# Altium PCB ebit_ad.PcbDoc (part 6 of 6)
Units mil, origin at the board's own origin, x right, y up, seen from the top; angles counter-clockwise.
Board outline 3958.82 x 3829.88 mil, 4 copper layers (Top Layer, MidLayer1, MidLayer2, Bottom Layer); 565 components, 392 nets, 1912 pads, 1242 vias.
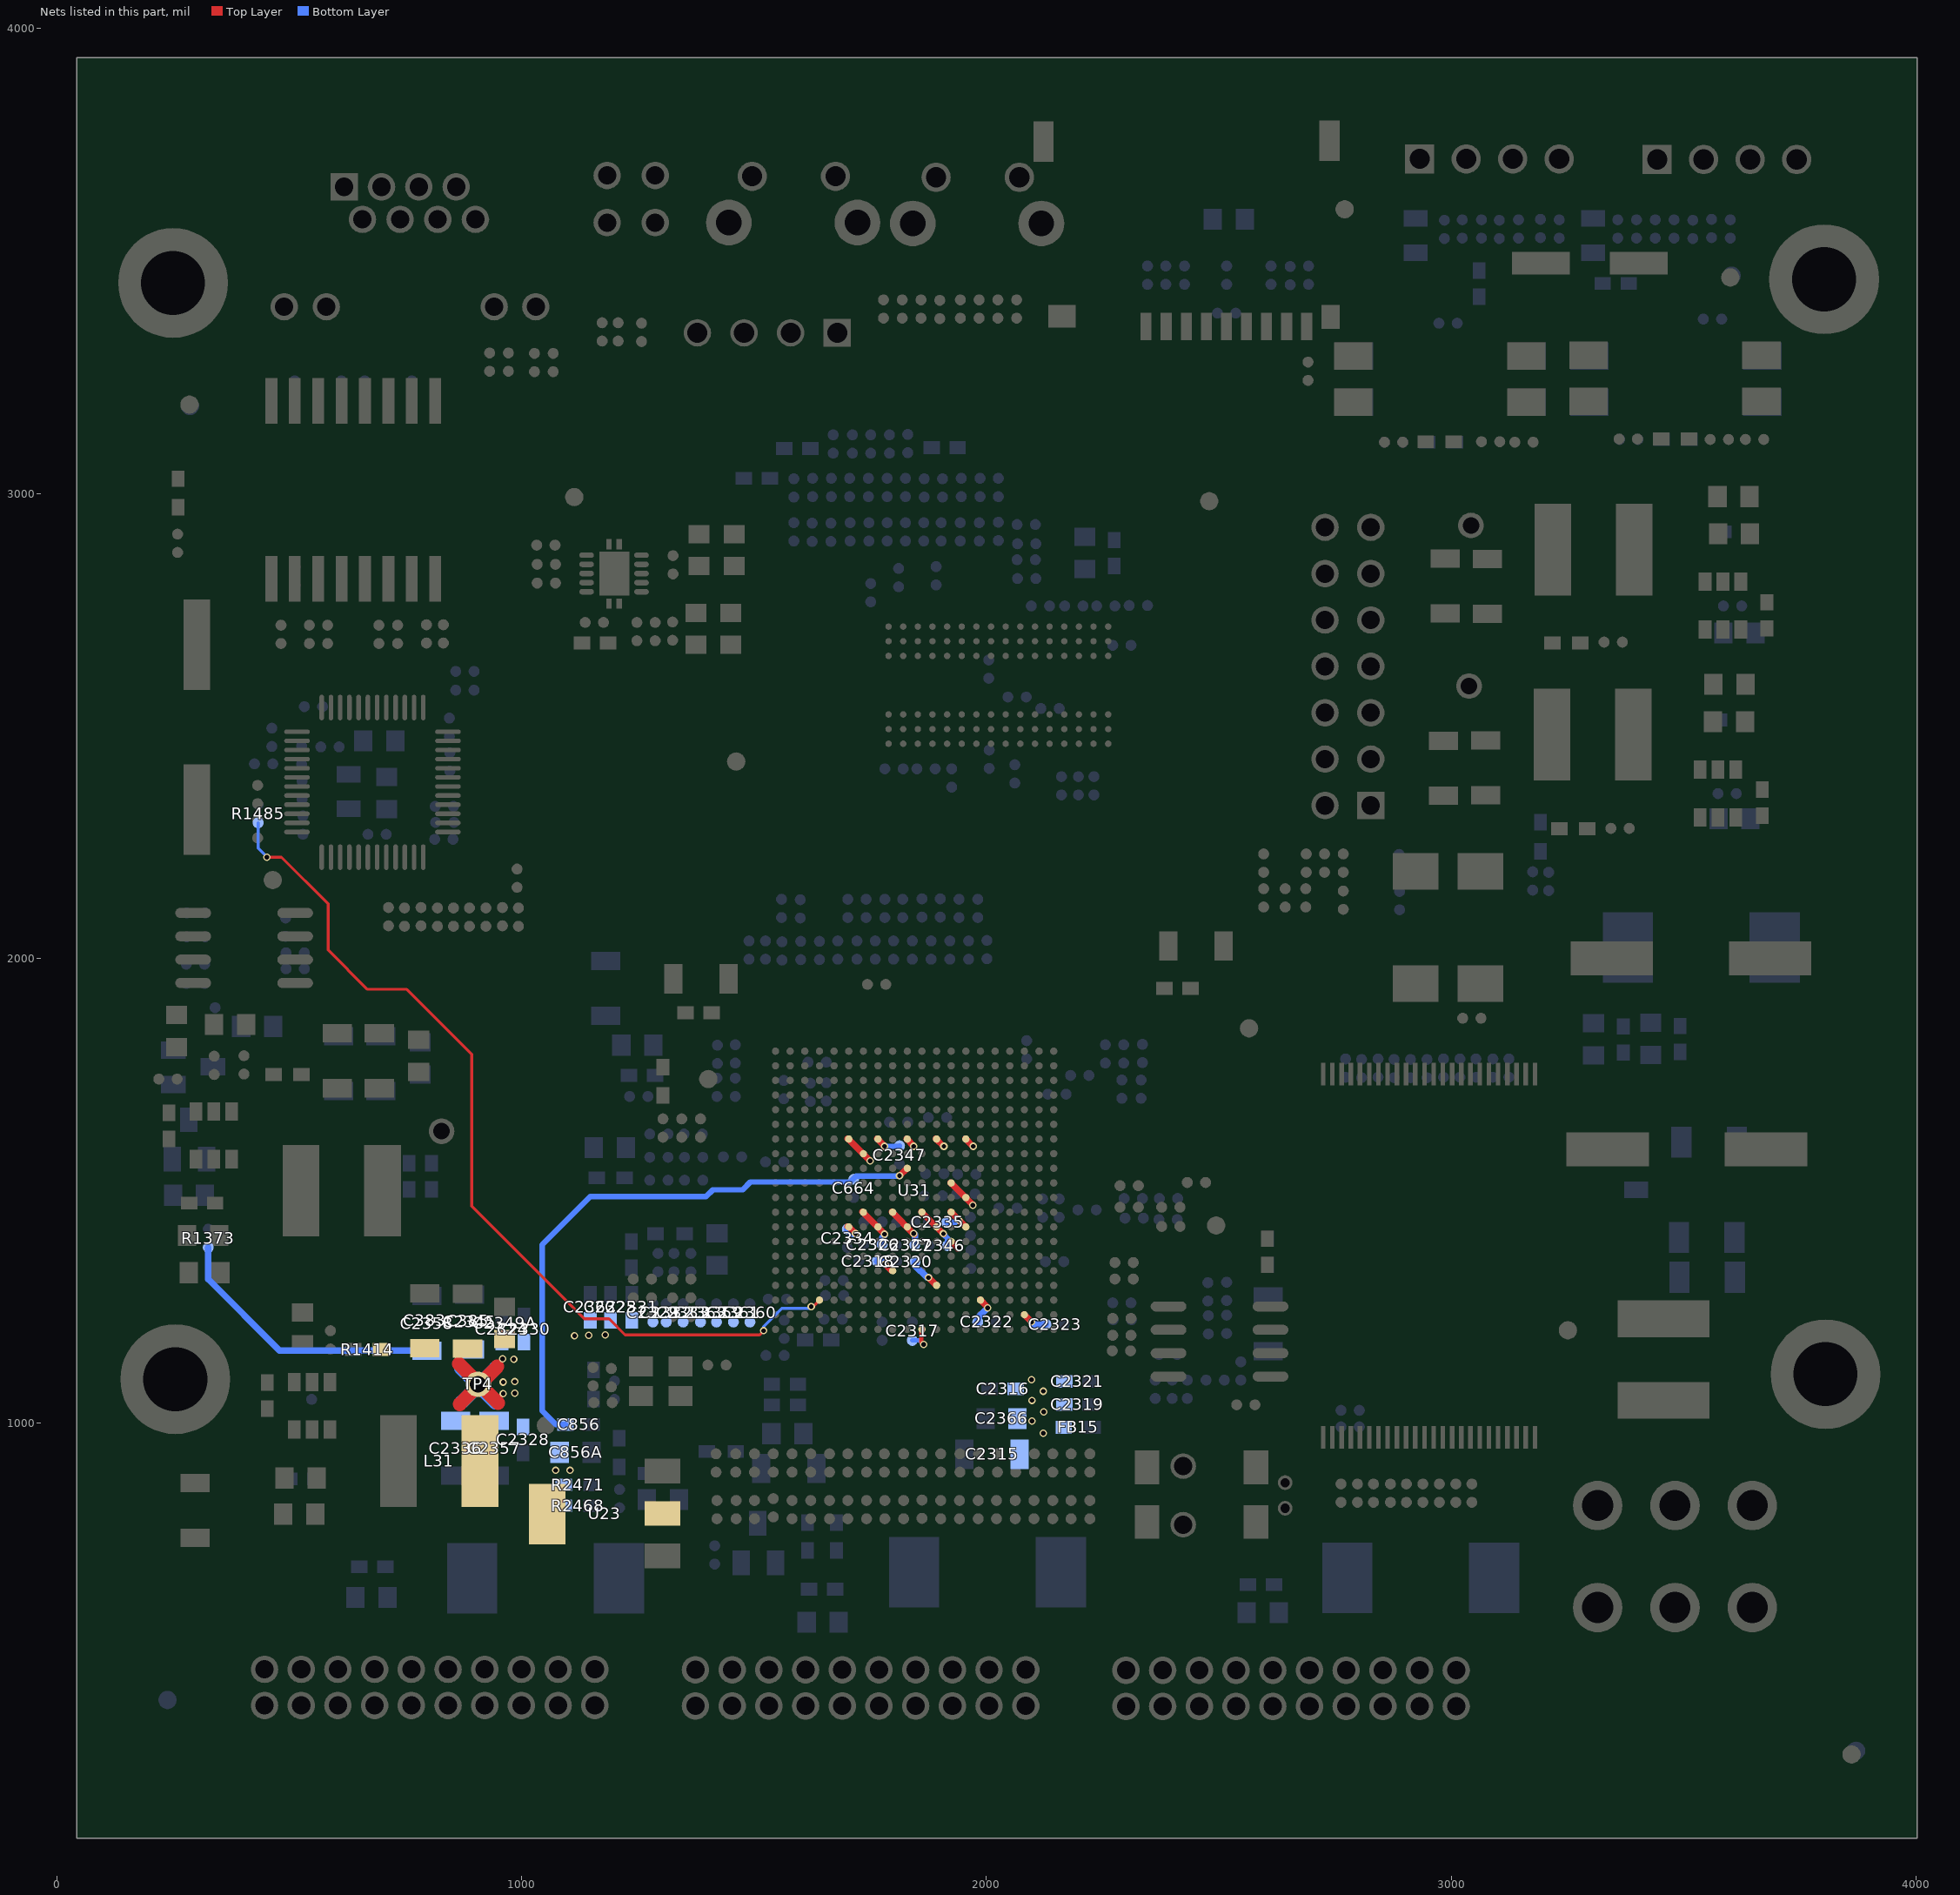
[diagram p8: the nets of this part, all layers, seen from the top]

## Via types
v1: diameter 16, hole 10, Top Layer to Bottom Layer, 1242 vias

## Nets (pads, with @x,y where several pads share a name; then routed paths per layer and width w, separated by ;. In a path a pad name is that pad's centre, name@x,y a point inside that pad or via, vN(x,y) a via of type N, cw(c..) or ccw(c..) an arc to the next point about the centre after c; other vN are vias at no path point) (continued)
VCCO: C2315.1 C2316.1 C2317.2 C2318.1 C2319.2 C2320.1 C2321.2 C2322.2 C2323.2 C2366.1 FB15.2 U31.C19 U31.F18 U31.H14 U31.J17 U31.K20 U31.M16 | length 312.1
  Top Layer w10: U31.K20@1859.82,1202.76 1859.82,1174.63 v1(1865.16,1169.29)
  Top Layer w14: v1(1781.5,1342.52) 1795.48,1328.53 U31.M16@1796.52,1328.53 ; v1@1876.97,1312.01 1876.97,1311.59 U31.J17@1891.47,1297.09 ; U31.H14@1923.13,1391.42 1938.98,1375.57 v1@1938.98,1375 ; U31.F18@1986.43,1265.65 2002.95,1249.12 v1@2002.95,1249.02 ; U31.C19@2081.38,1234.2 2097.44,1218.14 v1(2097.44,1217.52)
  Bottom Layer w10: C2317.2@1840.55,1178.15 1856.3,1178.15 v1(1865.16,1169.29)
  Bottom Layer w14: C2318.1@1764.76,1348.42 1775.59,1348.42 v1(1781.5,1342.52) ; C2320.1@1846.46,1347.44 1846.46,1338.58 1872.05,1312.99 v1@1876.97,1312.99 ; C2322.2@1981.3,1217.52 1981.3,1226.38 v1@2000,1245.08 ; v1@2097.44,1216.54 2101.38,1212.6 C2323.2@2127.95,1212.6
  other v1: 2122.49,978.1 2097.89,1004.66 2123.47,1024.34 2097.89,1048.94 2122.49,1068.62 2096.9,1093.22 2002.25,1247.9 1875,1312.99 1940.94,1375.98
VCCP: C383.1 C385.1 C2324.1 C2325.1 C2326.1 C2327.1 C2328.2 C2329.2 C2330.1 C2331.1 C2332.2 C2333.2 C2334.2 C2335.1 C2336.2 C2345.1 C2346.1 C2347.2 C2349A.1 C2357.2 C2358.1 C2359.2 C2360.2 C2361.2 C2362.1 C2363.2 L31.2 R1373.1 R1414.2 TP4.1 U31.G7 U31.G11 U31.G13 U31.H10 U31.H12 U31.J7 U31.J13 U31.K12 U31.L7 U31.L13 U31.M12 U31.N7 U31.N13 U31.P8 U31.P12 U31.R7 U31.R13 | length 1692.8
  Top Layer w14: U31.R13@1701.57,1422.87 1703.12,1422.87 v1(1718.5,1407.48) ; U31.R7@1701.57,1611.53 1702.44,1611.53 v1(1750,1563.98) ; U31.P12@1733.22,1454.31 1780.51,1407.02 v1(1780.51,1406.5) ; U31.N7@1764.87,1611.53 1780.51,1595.89 v1(1780.51,1595.47) ; U31.M12@1796.52,1454.31 v1@1844.49,1406.34 ; U31.L7@1828.17,1611.53 1843.5,1596.2 v1(1843.5,1595.47) ; U31.K12@1859.82,1454.31 v1@1907.64,1406.5 ; U31.J7@1891.47,1611.53 1907.53,1595.47 v1(1908.46,1595.47) ; U31.H12@1923.13,1454.31 1954.57,1422.87 U31.G13@1954.78,1422.87 ; U31.H10@1923.12,1517.2 1969.85,1470.47 v1@1970.47,1470.47 ; U31.G7@1954.78,1611.53 1970.84,1595.47 v1(1971.46,1595.47)
  Top Layer w30: 864.94,1127.66 949.56,1043.04 ; 866.9,1041.07 947.59,1121.76
  Bottom Layer w12: v1@1782.48,1595.47 1812.01,1595.47 C2347.2@1812.99,1596.46 ; v1@1909.45,1404.53 1916.34,1397.64 C2346.1@1916.34,1381.89 ; C2335.1@1914.37,1432.09 1934.06,1432.09 v1@1938.98,1437.01
  Bottom Layer w14: R1373.1@325.79,1377.95 325.79,1310.04 479.33,1156.5 787.4,1156.5 C2358.1@791.34,1152.56 ; C2334.2@1700.35,1415.98 1709.21,1407.12 v1@1717.08,1407.12 ; C2326.1@1775.59,1383.86 1775.59,1399.61 v1@1780.51,1404.53 ; v1@1842.05,1410.07 1845.98,1406.14 C2327.1@1845.98,1382.52
  Bottom Layer w30: 869.86,1117.82 943.66,1044.02 ; 870.84,1045.01 943.66,1117.82
  other v1: 960.38,1063.7 984.98,1064.69 960.38,1088.3 984.98,1089.29 959.4,1138.49 983.02,1137.5 1113.89,1187.69 1144.39,1188.67 1179.82,1189.66 1907.48,1407.48 1843.25,1407.58 1940.41,1437.02 1970.47,1468.5
VP1_0: C664.2 C856.2 C856A.2 R2468.2 R2471.2 U23.2 U23.4 U31.L9 | length 1272.4
  Top Layer w14: v1(1812.99,1532.48) 1828.17,1547.66 U31.L9@1828.17,1548.64
  Bottom Layer w12: 1044.29,1026.57 1044.29,1383.86 1147.64,1487.2 1396.65,1487.2 1411.42,1501.97 1475.39,1501.97 1492.13,1518.7 1706.69,1518.7 1719.49,1531.5 1812.01,1531.5 v1@1812.99,1530.51 ; 1044.29,1026.57 1073.82,997.05 C856.2@1094.49,997.05
  other v1: 1073.54,898.39 1104.05,898.39
XOUT.0_0: R1485.1 U31.U18 | length 1976.9
  Top Layer w6: v1@452.76,2217.52 483.27,2217.52 583.66,2117.13 583.66,2017.72 668.31,1933.07 752.95,1933.07 892.72,1793.31 892.72,1466.54 1134.84,1224.41 1187.99,1224.41 1222.44,1189.96 1511.81,1189.96 v1(1520.67,1198.82) ; v1@1625,1249.02 1638.26,1262.28 U31.U18@1638.26,1265.65
  Bottom Layer w6: R1485.1@433.07,2291.34 433.07,2237.2 v1@453.74,2216.54 ; v1(1520.67,1198.82) 1520.67,1207.68 1560.04,1247.05 v1@1620.08,1247.05
  other v1: 1623.03,1250.98 451.77,2217.52
pads on no net: DATA1.10 DATA2.10 DATA3.10 J8.12 J8.14 R2434.1 R2435.1 R2441.1 R2442.1 R2443.1 R2444.2 R2445B.2 R2446.2 R2447.2 T6.4 T6.5 T6.12 T6.13 U12.1 U12.2 U12.3 U12.4 U12.5 U12.6 U12.10 U12.11 U12.14 U12.15 U12.20 U12.21 U12.22 U12.23 U12.24 U12.26 U12.27 U12.28 U12.33 U12.35 U12.40 U12.45 U12.46 U12.47 U24.1 U24.27 U24.37 U24.38 U24.39 U31.A7 U31.A10 U31.A11 U31.B9 U31.B17 U31.C8 U31.C10 U31.C11 U31.D10 U31.D11 U31.D15 U31.E14 U31.E17 U31.E18 U31.F14 U31.F16 U31.F17 U31.G14 U31.G15 U31.G17 U31.G18 U31.H15 U31.J14 U31.J15 U31.J16 U31.K14 U31.K16 U31.L15 U31.M14 U31.M15 U31.N15 U31.P1 U31.P3 U31.P14 U31.P15 U31.P16 U31.R1 U31.R2 U31.R3 U31.R14 U31.R16 U31.R17 U31.T1 U31.T2 U31.T4 U31.T5 U31.T9 U31.T10 U31.T11 U31.T12 U31.T14 U31.T15 U31.T16 U31.T17 U31.U2 U31.U3 U31.U4 U31.U5 U31.U7 U31.U8 U31.U9 U31.U10 U31.U17 U31.V1 U31.V2 U31.V3 U31.V5 U31.V6 U31.V7 U31.V8 U31.V10 U31.V11 U31.W1 U31.W3 U31.W4 U31.W5 U31.W6 U31.W8 U31.W9 U31.W10 U31.W11 U31.Y1 U31.Y2 U31.Y3 U31.Y4 U31.Y6 U31.Y7 U31.Y8 U31.Y9 U31.Y11 U31.Y12 U31.Y13 U65.5 U65.6 U65.8 U66.J1 U66.J9 U66.L1 U66.L9 U66.M7 Y2.3 Y2.4

## Polygon pours and split planes (outlines as drawn)
GNDA on Top Layer "Top Layer-GNDA" (solid, remove dead copper, pour order 914): 71.83,848.21 358.18,848.21 405.41,895.44 405.41,1168.99 338.5,1235.9 152.52,1235.9 127.92,1260.5 127.92,3124.2 388.68,3384.96 388.68,3800.21 435.91,3847.44 3733.3,3847.44 3804.14,3776.59 3804.14,3687.05 3656.54,3539.45 3656.54,3391.85 3811.03,3237.36 3811.03,1321.51 3657.53,1168.01 3657.53,1045.99 3755.93,947.59 3949.78,947.59 3973.39,971.21 3973.39,3747.07 ccw(c3817.92,3747.07) 3817.92,3902.54 220.42,3902.54 ccw(c220.42,3751.01) 68.88,3751.01 68.88,850.18
GND on Top Layer "Top Layer-GND 8" (solid, remove dead copper, pour order 913): 1289.04,1743.65 1357.92,1743.65 1357.92,1763.33 1368.74,1774.15 1368.74,1960.13 1458.29,2049.67 1458.29,2373.41 cw(c1458.29,2415.72) 1415.98,2415.72 cw(c1473.05,2415.72) 1473.05,2472.79 1492.73,2472.79 1492.73,2628.26 1700.35,2835.89 1967.02,2835.89 2039.83,2763.07 2301.58,2763.07 2435.4,2629.25 2435.4,1938.48 2237.62,1740.7 2237.62,1727.9 2386.2,1727.9 2400.96,1742.66 2400.96,1783.01 2542.66,1924.7 2542.66,2840.81 2214,3169.46 1247.71,3169.46 1169.98,3091.73 1169.98,2649.91 1111.92,2591.86 1111.92,2566.27 1146.36,2531.83 1146.36,2082.14 1288.06,1940.45 1288.06,1744.63
NetL37_1 on Top Layer "Top Layer-NetL37_1" (solid, remove dead copper, pour order 912): 3245.23,1114.87 3607.34,1114.87 3628.01,1094.21 3628.01,1024.34 3830.71,821.64 3830.71,411.31 3804.14,384.74 3180.29,384.74 3156.67,408.36 3156.67,824.59 3225.55,893.47 3225.55,1096.18 3245.23,1115.86
VCC8 on Top Layer "Top Layer-VCC8" (solid, remove dead copper, pour order 911): 3341.66,1288.06 3341.66,1175.88 3602.42,1175.88 3766.75,1340.21 3766.75,2167.75 3752.98,2181.53 3528.62,2181.53 3528.62,1468.13 3348.55,1288.06
GND3 on Top Layer "Top Layer-GND3" (solid, remove dead copper, pour order 910): 3252.12,2030.98 3437.11,2030.98 3490.25,1977.84 3490.25,1475.02 3310.18,1294.94 3252.12,1294.94
VCC1 on Top Layer "Top Layer-VCC1" (solid, remove dead copper, pour order 909): 1240.82,2823.1 1295.93,2823.1 1304.78,2814.24 1523.23,2814.24 1655.09,2946.1 2038.85,2946.1 2046.72,2953.97 2046.72,3056.3 2023.1,3079.92 1580.3,3079.92 1518.31,3017.93 1518.31,2900.83 1491.74,2874.26 1371.7,2874.26 1338.24,2840.81 1293.96,2840.81 1285.1,2831.95 1242.79,2831.95 1242.79,2823.1
VCCA on Top Layer "Top Layer-VCCA" (solid, remove dead copper, pour order 908): 513.65,1775.14 822.62,1775.14 854.11,1743.65 854.11,1597.03 788.18,1531.1 788.18,1394.33 652.39,1394.33 652.39,1623.6 609.1,1666.9 531.36,1666.9 509.71,1688.54 509.71,1772.18
VCC on Top Layer "Top Layer-VCC" (solid, remove dead copper, pour order 907): 2946.1,2631.22 3259.99,2631.22 3271.8,2619.41 3271.8,2389.15 3262.94,2380.3 3124.2,2380.3 3090.74,2413.75 2946.1,2413.75 2935.27,2424.58 2935.27,2619.41 2946.1,2630.23
VCCP on Top Layer "Top Layer-VCCP" (solid, remove dead copper, pour order 906): 690.77,1196.54 981.05,1196.54 993.84,1183.75 993.84,814.75 986.95,807.86 848.21,807.86 848.21,1045.01 783.26,1109.95 774.41,1118.81 693.72,1118.81 681.91,1130.62 681.91,1185.72 690.77,1194.58
VCC-DDR on Top Layer "Top Layer-VCC-DDR" (solid, remove dead copper, pour order 905): 2900.83,2979.55 3260.98,2979.55 3260.98,2772.91 3142.9,2772.91 3107.47,2808.34 2894.93,2808.34 2894.93,2973.65
GND on Top Layer "Top Layer-GND 4" (solid, remove dead copper, pour order 904): 495.94,1324.46 943.66,1324.46 976.13,1291.99 976.13,1225.08 966.29,1215.24 490.03,1215.24 490.03,1317.58
NetU22_2 on Top Layer "Top Layer-NetU22_2" (solid, remove dead copper, pour order 902): 3349.54,2591.86 3463.68,2591.86 3477.46,2578.08 3477.46,2396.04 3499.1,2374.39 3564.05,2374.39 3564.05,2422.61 3584.71,2422.61 3584.71,2349.79 3571.92,2337 3360.36,2337 3341.66,2355.7 3341.66,2581.03 3349.54,2588.9
NetU26_2 on Top Layer "Top Layer-NetU26_2" (solid, remove dead copper, pour order 901): 538.25,972.19 560.88,972.19 560.88,1018.44 628.78,1018.44 650.42,996.79 650.42,810.82 783.26,810.82 783.26,1031.23 759.65,1054.85 552.02,1054.85 538.25,1041.07
NetU28_2 on Top Layer "Top Layer-NetU28_2" (solid, remove dead copper, pour order 900): 448.7,1391.38 572.69,1391.38 572.69,1619.66 558.91,1633.44 336.53,1633.44 325.7,1622.62 325.7,1551.77 347.35,1551.77 347.35,1600.97 414.26,1600.97 437.88,1577.35 437.88,1402.2
NetU27_2 on Top Layer "Top Layer-NetU27_2" (solid, remove dead copper, pour order 899): 3346.58,2987.42 3471.55,2987.42 3478.44,2980.54 3478.44,2803.42 3501.07,2780.78 3564.05,2780.78 3574.87,2791.61 3574.87,2828.02 3597.5,2828.02 3597.5,2762.09 3578.81,2743.39 3368.23,2743.39 3347.57,2764.06 3347.57,2982.5
VP1_0 on Top Layer "Top Layer-VP1_0" (solid, remove dead copper, pour order 898): 1125.7,916.1 1211.3,830.5 1346.11,830.5 1346.11,777.36 1153.25,777.36 1103.06,727.18 1024.34,727.18 1016.47,735.05 1016.47,867.89 1065.67,917.09 1126.68,917.09
IN on Top Layer "Top Layer-IN 2" (solid, remove dead copper, pour order 897): 324.72,1498.63 324.72,1306.75 340.46,1291.01 404.42,1291.01 419.18,1305.77 419.18,1552.75 388.68,1583.26 365.06,1583.26 365.06,1533.07 329.64,1497.65
VCC8 on Top Layer "Top Layer-VCC8 1" (solid, remove dead copper, pour order 896): 3124.2,3510.91 3124.2,3400.7 3139.94,3384.96 3292.46,3384.96 3307.22,3399.72 3307.22,3512.88 3302.3,3517.8 3127.15,3517.8
GND on Top Layer "Top Layer-GND 5" (solid, remove dead copper, pour order 895): 285.36,1584.24 232.22,1531.1 232.22,1304.78 247.97,1289.04 304.06,1289.04 304.06,1520.28 309.96,1526.18 309.96,1584.24
GND on Top Layer "Top Layer-GND 2" (solid, remove dead copper, pour order 894): 2947.08,2778.82 3101.57,2778.82 3113.38,2767.01 3113.38,2674.51 3105.5,2666.64 2949.05,2666.64 2941.18,2674.51 2941.18,2767.01 2948.06,2773.9
VCC-DDR on Top Layer "Top Layer-VCC-DDR 1" (solid, remove dead copper, pour order 893): 1393.34,1955.21 1428.77,1990.63 1495.68,1990.63 1503.55,1982.76 1503.55,1823.35 1489.78,1809.58 1409.09,1809.58 1394.33,1824.34 1394.33,1955.21
VCC-DDR on Top Layer "Top Layer-VCC-DDR 2" (solid, remove dead copper, pour order 892): 1244.76,2811.29 1287.07,2811.29 1300.85,2797.51 1499.62,2797.51 1499.62,2727.65 1485.84,2713.87 1281.17,2713.87 1281.17,2754.22 1293.96,2767.01 1293.96,2796.53 1287.07,2803.42 1244.76,2803.42
GND on Top Layer "Top Layer-GND" (solid, remove dead copper, pour order 891): 2946.1,2371.44 3103.54,2371.44 3112.39,2362.58 3112.39,2280.91 3101.57,2270.09 2948.06,2270.09 2937.24,2280.91 2937.24,2359.63 2948.06,2370.46
VCC on Top Layer "Top Layer-VCC 2" (solid, remove dead copper, pour order 890): 1025.33,2851.63 1025.33,2680.42 1048.94,2656.8 1141.44,2656.8 1148.33,2663.69 1148.33,2789.64 1046.98,2789.64 1046.98,2853.6 1025.33,2853.6
GND3 on Top Layer "Top Layer-GND3 1" (solid, remove dead copper, pour order 889): 3341.66,3518.78 3466.63,3518.78 3466.63,3387.91 3458.76,3380.04 3365.28,3380.04 3365.28,3433.18 3361.34,3437.11 3342.65,3437.11 3342.65,3517.8
GND on Top Layer "Top Layer-GND 1" (solid, remove dead copper, pour order 888): 3614.23,2614.49 3673.27,2614.49 3684.1,2603.66 3684.1,2439.34 3634.9,2390.14 3603.41,2390.14 3603.41,2451.14 3611.28,2459.02 3611.28,2614.49
GND on Top Layer "Top Layer-GND 3" (solid, remove dead copper, pour order 887): 3624.07,3020.88 3678.19,3020.88 3688.03,3011.04 3688.03,2839.82 3637.85,2789.64 3612.26,2789.64 3612.26,2864.42 3617.18,2869.34 3617.18,3010.06 3626.04,3018.91
GND on Top Layer "Top Layer-GND 6" (solid, remove dead copper, pour order 886): 494.95,1006.63 441.82,953.5 441.82,775.39 509.71,775.39 509.71,934.8 520.54,945.62 520.54,1003.68 494.95,1003.68
IN on Top Layer "Top Layer-IN" (solid, remove dead copper, pour order 885): 3511.9,2616.46 3587.66,2616.46 3587.66,2476.73 3545.35,2434.42 3545.35,2390.14 3518.78,2390.14 3512.88,2396.04 3512.88,2612.52
IN on Top Layer "Top Layer-IN 1" (solid, remove dead copper, pour order 884): 3521.74,3020.88 3596.52,3020.88 3596.52,2881.15 3558.14,2842.78 3558.14,2796.53 3527.64,2796.53 3522.72,2801.45 3522.72,3019.9
IN on Top Layer "Top Layer-IN 3" (solid, remove dead copper, pour order 883): 577.61,999.74 607.13,999.74 607.13,773.42 536.28,773.42 536.28,915.12 576.62,955.46 576.62,1000.73
VCC on Top Layer "Top Layer-VCC 1" (solid, remove dead copper, pour order 882): 1311.67,977.11 1361.86,977.11 1367.76,971.21 1367.76,852.14 1280.18,852.14 1266.41,865.92 1266.41,916.1 1301.83,916.1 1312.66,926.93 1312.66,975.14
GND on Top Layer "Top Layer-GND 7" (solid, remove dead copper, pour order 903): 388.68,1905.02 756.7,1905.02 812.78,1848.94 812.78,1812.53 804.91,1804.66 469.37,1804.66 442.8,1778.09 395.57,1778.09 383.76,1789.9 383.76,1902.07
GND on MidLayer1 "MidLayer1-GND" (solid, remove dead copper, pour order 917): 423.12,3904.51 1361.86,3904.51 2259.26,3810.05 2375.38,3810.05 2563.32,3873.02 2798.5,3896.64 2800.46,3628.99 3238.34,3190.13 3577.82,3188.16 3712.63,3055.32 3715.58,1949.3 3180.29,1423.85 3185.21,132.84 229.27,133.82 122.02,243.05 124.97,789.17 138.74,799.99 394.58,801.96 446.74,856.08 446.74,1230.98 409.34,1268.38 178.1,1268.38 164.33,1286.09 158.42,3052.37 413.28,3306.24 414.26,3889.75 424.1,3904.51
GND3 on MidLayer1 "MidLayer1-GND3" (solid, remove dead copper, pour order 916): 2813.26,3890.74 2813.26,3637.85 3245.23,3205.87 3588.65,3205.87 3729.36,3065.16 3729.36,1927.66 3715.58,1927.66 3199.97,1412.04 3199.97,132.84 3825.79,132.84 ccw(c3825.79,275.52) 3968.47,275.52 3968.47,3788.4 3918.29,3861.22 3869.09,3893.69 3813.98,3907.46
GNDA on MidLayer1 "MidLayer1-GNDA" (solid, remove dead copper, pour order 915): 386.71,3880.9 386.71,3332.81 126.94,3073.03 126.94,1266.41 152.52,1240.82 382.78,1240.82 404.42,1219.18 404.42,864.94 388.68,849.19 68.88,849.19 68.88,3783.48 113.16,3851.38 189.91,3888.77 325.7,3903.53 382.78,3902.54 386.71,3881.88
VCC on MidLayer2 "MidLayer2-VCC" (solid, remove dead copper, pour order 927): 429.02,3887.78 3700.82,3901.56 3835.63,3878.93 3923.21,3828.74 3961.58,3766.75 3961.58,3712.63 3945.84,3656.54 3185.21,3654.58 3098.62,3570.94 3098.62,3265.9 3223.58,3143.88 3222.6,2067.38 3153.72,2004.41 3157.66,1364.81 2548.56,757.68 795.07,754.73 556.94,990.89 556.94,1338.24 339.48,1554.72 340.46,1901.09 320.78,1918.8 158.42,1920.77 160.39,3103.54 420.17,3370.2 420.17,3886.8 430.01,3887.78
VCC-DDR on MidLayer2 "MidLayer2-VCC-DDR" (solid, remove dead copper, pour order 926): 1354.97,3108.46 2831.95,3108.46 2940.19,3000.22 2940.19,2667.62 2522.98,2250.41 2522.98,1955.21 2241.55,1673.78 1349.06,1673.78 1327.42,1695.43 1327.42,3075 1353.98,3108.46
IN on MidLayer2 "MidLayer2-IN" (solid, remove dead copper, pour order 925): 3240.31,3029.74 3693.94,3029.74 3708.7,3014.98 3708.7,1965.05 3587.66,1844.02 3587.66,1259.52 3128.14,799.99 3128.14,597.29 3052.37,521.52 407.38,521.52 407.38,1185.72 327.67,1265.42 203.69,1265.42 161.38,1307.74 161.38,1900.1 320.78,1900.1 320.78,1543.9 541.2,1323.48 541.2,969.24 771.46,738.98 2562.34,738.98 3175.37,1352.02 3175.37,1992.6 3240.31,2057.54
GNDA on MidLayer2 "MidLayer2-GNDA" (solid, remove dead copper, pour order 924): 3743.14,1255.58 3956.66,1255.58 3956.66,268.63 3828.74,140.71 192.86,140.71 118.08,182.04 69.86,263.71 68.88,3643.75 121.03,3808.08 201.72,3874.99 290.28,3894.67 384.74,3893.69 381.79,3370.2 122.02,3114.36 123,1260.5 156.46,1226.06 302.09,1227.05 376.87,1154.23 369.98,314.88 391.63,295.2 3741.17,302.09 3823.82,385.73 3823.82,881.66 3657.53,1049.93 3655.56,1173.91
VCC8 on MidLayer2 "MidLayer2-VCC8" (solid, remove dead copper, pour order 923): 3196.03,3638.83 3957.65,3638.83 3957.65,1611.79 3908.45,1562.59 3623.09,1562.59 3612.26,1573.42 3612.26,1830.24 3735.26,1953.24 3735.26,3030.72 3690,3075.98 3322.97,3075.98 3130.1,3268.85 3130.1,3574.87 3193.08,3637.85
VCCP on MidLayer2 "MidLayer2-VCCP" (solid, remove dead copper, pour order 922): 878.71,1025.33 1399.25,1025.33 1399.25,1130.62 1575.38,1306.75 1754.47,1306.75 1754.47,1363.82 1759.39,1368.74 1891.25,1368.74 1919.78,1397.28 1987.68,1397.28 2076.24,1485.84 2076.24,1555.7 2048.69,1583.26 2048.69,1616.71 1857.79,1616.71 1849.92,1608.84 1469.11,1608.84 1429.75,1569.48 1172.93,1569.48 1172.93,1583.26 931.85,1824.34 748.82,1824.34 684.86,1760.38 684.86,1481.9 864.94,1301.83 864.94,1045.01 879.7,1025.33
NetL37_1 on MidLayer2 "MidLayer2-NetL37_1" (solid, remove dead copper, pour order 921): 3177.34,381.79 3755.93,381.79 3782.5,408.36 3782.5,876.74 3681.14,978.1 3361.34,978.1 3152.74,769.49 3152.74,410.33 3180.29,382.78
VCCA on MidLayer2 "MidLayer2-VCCA" (solid, remove dead copper, pour order 920): 787.2,1738.73 844.27,1738.73 860.02,1722.98 860.02,1690.51 1075.51,1475.02 1470.1,1475.02 1528.15,1533.07 1825.32,1533.07 1857.79,1565.54 1997.52,1565.54 1997.52,1549.8 1910.93,1463.21 1774.15,1463.21 1760.38,1476.98 1571.45,1476.98 1453.37,1358.9 1033.2,1358.9 772.44,1619.66 772.44,1720.03 787.2,1734.79
VCCO on MidLayer2 "MidLayer2-VCCO" (solid, remove dead copper, pour order 919): 1809.58,958.42 2162.83,958.42 2181.53,977.11 2181.53,1162.1 2096.9,1246.73 2029.99,1246.73 1964.06,1312.66 1964.06,1370.71 1957.18,1377.6 1926.67,1377.6 1902.07,1353 1766.28,1353 1766.28,1301.83 1806.62,1261.49 1806.62,959.4
VCCE on MidLayer2 "MidLayer2-VCCE" (solid, remove dead copper, pour order 918): 1437.62,955.46 1789.9,955.46 1789.9,1253.62 1752.5,1291.01 1585.22,1291.01 1418.93,1124.71 1418.93,977.11
GND on Bottom Layer "Bottom Layer-GND" (solid, remove dead copper, pour order 979): 1264.44,1687.56 1364.81,1687.56 1382.52,1705.27 1382.52,1884.36 1450.42,1952.26 1450.42,2606.62 1537.99,2694.19 1537.99,2959.87 1501.58,2996.28 1501.58,3053.35 1514.38,3066.14 1539.96,3066.14 1598.02,3124.2 1912.9,3124.2 1912.9,3080.9 2050.66,3080.9 2092.97,3038.59 2092.97,2883.12 2292.72,2883.12 2326.18,2849.66 2335.03,2840.81 2335.03,2742.41 2444.26,2633.18 2444.26,1939.46 2368.49,1863.7 2368.49,1755.46 2358.65,1745.62 2358.65,1724.95 2372.42,1724.95 2372.42,1733.81 2443.27,1804.66 2443.27,1866.65 2520.02,1943.4 2520.02,2848.68 2173.66,3195.05 1292.98,3195.05 1111.92,3013.99 1111.92,1946.35 1139.47,1918.8 1220.16,1918.8 1262.47,1876.49 1262.47,1688.54
GNDA on Bottom Layer "Bottom Layer-GNDA" (solid, remove dead copper, pour order 978): 3639.82,946.61 3961.58,946.61 3974.38,959.4 3974.38,3571.92 3922.22,3624.07 3722.47,3624.07 3657.53,3559.13 3657.53,3390.86 3814.97,3233.42 3814.97,1665.91 3787.42,1638.36 3579.79,1638.36 3564.05,1622.62 3564.05,1017.46 3634.9,946.61
VCC8 on Bottom Layer "Bottom Layer-VCC8 1" (solid, remove dead copper, pour order 977): 3567,2172.67 3776.59,2172.67 3776.59,1671.82 3562.08,1671.82 3562.08,2171.69
GND on Bottom Layer "Bottom Layer-GND 3" (solid, remove dead copper, pour order 976): 3217.68,1804.66 3522.72,1804.66 3522.72,1545.86 3137.98,1545.86 3123.22,1560.62 3123.22,1713.14 3213.74,1803.67
IN on Bottom Layer "Bottom Layer-IN 2" (solid, remove dead copper, pour order 975): 3278.69,1832.21 3532.56,1832.21 3532.56,2186.45 3521.74,2197.27 3337.73,2197.27 3270.82,2130.36 3270.82,1842.05 3279.67,1833.19
GND3 on Bottom Layer "Bottom Layer-GND3" (solid, remove dead copper, pour order 974): 3249.17,1518.31 3520.75,1518.31 3520.75,1215.24 3257.04,1215.24 3243.26,1229.02 3243.26,1514.38
VCC-DATA1 on Bottom Layer "Bottom Layer-VCC-DATA1" (solid, remove dead copper, pour order 973): 2895.91,745.87 3130.1,745.87 3138.96,737.02 3138.96,345.38 2975.62,345.38 2975.62,510.7 2891.98,594.34 2891.98,742.92
VCC-DATA2 on Bottom Layer "Bottom Layer-VCC-DATA2" (solid, remove dead copper, pour order 972): 2066.4,774.41 2208.1,774.41 2227.78,754.73 2227.78,348.34 2219.9,340.46 2055.58,340.46 2044.75,351.29 2044.75,751.78 2066.4,773.42
VCC-DATA3 on Bottom Layer "Bottom Layer-VCC-DATA3" (solid, remove dead copper, pour order 971): 1144.39,737.02 1274.28,737.02 1302.82,708.48 1302.82,349.32 1295.93,342.43 1124.71,342.43 1124.71,726.19 1145.38,726.19
VCCA on Bottom Layer "Bottom Layer-VCCA" (solid, remove dead copper, pour order 970): 596.3,1775.14 861,1775.14 877.73,1758.41 877.73,1599 820.66,1541.93 610.08,1541.93 572.69,1579.32 572.69,1754.47 592.37,1774.15
NetJ3_2 on Bottom Layer "Bottom Layer-NetJ3_2" (solid, remove dead copper, pour order 969): 3281.64,3574.87 3366.26,3574.87 3366.26,3766.75 3377.09,3777.58 3478.44,3777.58 3490.25,3765.77 3490.25,3663.43 3575.86,3663.43 3589.63,3677.21 3589.63,3835.63 3548.3,3876.96 3314.11,3876.96 3277.7,3840.55 3277.7,3574.87
VCCP on Bottom Layer "Bottom Layer-VCCP 1" (solid, remove dead copper, pour order 968): 772.44,1193.59 1017.46,1193.59 1017.46,980.06 1011.55,974.16 820.66,974.16 754.73,1040.09 754.73,1178.83 770.47,1194.58
IN on Bottom Layer "Bottom Layer-IN 6" (solid, remove dead copper, pour order 967): 1655.09,741.94 1655.09,546.12 1667.88,533.33 1875.5,533.33 1914.86,572.69 1914.86,730.13 1897.15,747.84 1661.98,747.84
NetJ5_2 on Bottom Layer "Bottom Layer-NetJ5_2" (solid, remove dead copper, pour order 966): 2821.13,3856.3 3049.42,3856.3 3075,3830.71 3075,3687.05 3057.29,3669.34 2995.3,3669.34 2983.49,3681.14 2983.49,3758.88 2966.76,3775.61 2886.07,3775.61 2872.3,3761.83 2872.3,3662.45 2888.04,3646.7 2979.55,3646.7 2996.28,3629.98 2996.28,3568.97 2854.58,3568.97 2807.35,3616.2 2807.35,3837.6 2820.14,3850.39
IN on Bottom Layer "Bottom Layer-IN 5" (solid, remove dead copper, pour order 965): 702.58,746.86 962.35,746.86 976.13,733.08 976.13,591.38 958.42,573.67 692.74,573.67 682.9,583.51 682.9,726.19 701.59,744.89
GND on Bottom Layer "Bottom Layer-GND 9" (solid, remove dead copper, pour order 964): 594.34,1324.46 1018.44,1324.46 1018.44,1228.03 1007.62,1217.21 593.35,1217.21 574.66,1235.9 574.66,1304.78 593.35,1323.48
IN on Bottom Layer "Bottom Layer-IN 3" (solid, remove dead copper, pour order 963): 2597.76,679.94 2597.76,571.7 2609.57,559.9 2826.05,559.9 2841.79,575.64 2841.79,720.29 2828.02,734.06 2656.8,734.06 2600.71,677.98
VCC8 on Bottom Layer "Bottom Layer-VCC8" (solid, remove dead copper, pour order 962): 2878.2,3537.48 2878.2,3464.66 2951.02,3391.85 3335.76,3391.85 3335.76,3521.74 3320.02,3537.48 3281.64,3537.48 3191.11,3446.95 3001.2,3446.95 2955.94,3492.22 2955.94,3537.48
GND on Bottom Layer "Bottom Layer-GND 7" (solid, remove dead copper, pour order 961): 458.54,1902.07 816.72,1902.07 816.72,1818.43 801.96,1803.67 459.53,1803.67 445.75,1817.45 445.75,1890.26 456.58,1901.09
GND on Bottom Layer "Bottom Layer-GND 8" (solid, remove dead copper, pour order 960): 682.9,1523.23 877.73,1523.23 892.49,1508.47 892.49,1388.42 869.86,1365.79 691.75,1365.79 677.98,1379.57 677.98,1521.26
GND on Bottom Layer "Bottom Layer-GND 16" (solid, remove dead copper, pour order 959): 1104.05,1258.54 1260.5,1258.54 1268.38,1250.66 1430.74,1250.66 1430.74,1297.9 1445.5,1312.66 1445.5,1363.82 1399.25,1363.82 1376.62,1341.19 1258.54,1341.19 1249.68,1350.05 1125.7,1350.05 1098.14,1322.5 1098.14,1266.41 1106.02,1258.54
VCCO on Bottom Layer "Bottom Layer-VCCO" (solid, remove dead copper, pour order 958): 2051.64,1103.06 2173.66,1103.06 2181.53,1095.19 2181.53,904.3 2171.69,894.46 2049.67,894.46 2040.82,903.31 2040.82,1092.24
VCCE on Bottom Layer "Bottom Layer-VCCE" (solid, remove dead copper, pour order 957): 1452.38,1092.24 1552.75,1092.24 1552.75,865.92 1545.86,859.03 1436.64,859.03 1426.8,868.87 1426.8,1065.67 1453.37,1092.24
GND on Bottom Layer "Bottom Layer-GND 14" (solid, remove dead copper, pour order 956): 1578.34,1103.06 1669.85,1103.06 1699.37,1073.54 1699.37,884.62 1684.61,869.86 1588.18,869.86 1573.42,884.62 1573.42,1100.11
GND on Bottom Layer "Bottom Layer-GND 12" (solid, remove dead copper, pour order 955): 819.67,955.46 1039.1,955.46 1039.1,840.34 1029.26,830.5 821.64,830.5 810.82,841.32 810.82,943.66 819.67,952.51
GND on Bottom Layer "Bottom Layer-GND 11" (solid, remove dead copper, pour order 954): 532.34,720.29 664.2,720.29 664.2,580.56 522.5,580.56 509.71,593.35 509.71,698.64 530.38,719.3
GND on Bottom Layer "Bottom Layer-GND 15" (solid, remove dead copper, pour order 953): 1544.88,743.9 1628.52,743.9 1628.52,550.06 1618.68,540.22 1535.04,540.22 1527.17,548.09 1527.17,719.3 1546.85,738.98
GND on Bottom Layer "Bottom Layer-GND 6" (solid, remove dead copper, pour order 952): 1919.78,1094.21 2015.23,1094.21 2015.23,908.23 2000.47,893.47 1923.72,893.47 1913.88,903.31 1913.88,1087.32
VCC on Bottom Layer "Bottom Layer-VCC 2" (solid, remove dead copper, pour order 951): 1147.34,1895.18 1208.35,1895.18 1242.79,1860.74 1242.79,1684.61 1161.12,1684.61 1147.34,1698.38
GND on Bottom Layer "Bottom Layer-GND 4" (solid, remove dead copper, pour order 950): 2478.7,711.43 2478.7,532.34 2487.55,523.49 2565.29,523.49 2577.1,535.3 2577.1,713.4 2568.24,722.26 2492.47,722.26 2479.68,709.46
VCC on Bottom Layer "Bottom Layer-VCC 3" (solid, remove dead copper, pour order 949): 1315.61,973.18 1406.14,973.18 1406.14,799.99 1394.33,788.18 1308.72,788.18 1308.72,964.32 1313.64,969.24
IN on Bottom Layer "Bottom Layer-IN 1" (solid, remove dead copper, pour order 948): 3522.72,2620.39 3579.79,2620.39 3588.65,2611.54 3588.65,2391.12 3526.66,2391.12 3515.83,2401.94 3515.83,2612.52 3521.74,2618.42
IN on Bottom Layer "Bottom Layer-IN" (solid, remove dead copper, pour order 947): 3522.72,3015.96 3594.55,3015.96 3594.55,2821.13 3532.56,2821.13 3517.8,2835.89 3517.8,3007.1 3522.72,3012.02
VCCP on Bottom Layer "Bottom Layer-VCCP" (solid, remove dead copper, pour order 946): 1102.08,1229.02 1102.08,1173.91 1196.54,1173.91 1223.11,1200.48 1498.63,1200.48 1502.57,1204.42 1502.57,1224.1 1264.44,1224.1 1254.6,1233.94 1099.13,1233.94
GND on Bottom Layer "Bottom Layer-GND 2" (solid, remove dead copper, pour order 945): 3613.25,2619.41 3678.19,2619.41 3688.03,2609.57 3688.03,2459.02 3680.16,2451.14 3617.18,2451.14 3606.36,2461.97 3606.36,2610.55 3612.26,2616.46
VCC on Bottom Layer "Bottom Layer-VCC" (solid, remove dead copper, pour order 944): 2583,1358.9 2652.86,1358.9 2669.59,1342.18 2669.59,1236.89 2658.77,1226.06 2584.97,1226.06 2578.08,1232.95 2578.08,1352.02
GND on Bottom Layer "Bottom Layer-GND 10" (solid, remove dead copper, pour order 943): 434.93,928.9 434.93,774.41 498.89,774.41 508.73,784.25 508.73,926.93 500.86,934.8 444.77,934.8 437.88,927.91
IN on Bottom Layer "Bottom Layer-IN 4" (solid, remove dead copper, pour order 942): 538.25,941.69 603.19,941.69 603.19,772.44 535.3,772.44 535.3,937.75
GND on Bottom Layer "Bottom Layer-GND 1" (solid, remove dead copper, pour order 941): 3624.07,3018.91 3686.06,3018.91 3686.06,2864.42 3673.27,2851.63 3623.09,2851.63 3617.18,2857.54 3617.18,3012.02
VCC-DDR on Bottom Layer "Bottom Layer-VCC-DDR" (solid, remove dead copper, pour order 940): 1408.1,1804.66 1507.49,1804.66 1507.49,1930.61 1495.68,1942.42 1476,1942.42 1409.09,1875.5 1409.09,1805.64
VCCB on Bottom Layer "Bottom Layer-VCCB" (solid, remove dead copper, pour order 939): 1203.43,1630.49 1289.04,1630.49 1289.04,1514.38 1196.54,1514.38 1196.54,1622.62 1202.45,1628.52
VP1_0 on Bottom Layer "Bottom Layer-VP1_0" (solid, remove dead copper, pour order 938): 1068.62,1014.5 1107.98,1014.5 1107.98,800.98 1057.8,800.98 1057.8,1001.71 1067.64,1011.55
GND on Bottom Layer "Bottom Layer-GND 13" (solid, remove dead copper, pour order 937): 1238.86,972.19 1289.04,972.19 1289.04,789.17 1245.74,789.17 1236.89,798.02 1236.89,971.21
GND3 on Bottom Layer "Bottom Layer-GND3 1" (solid, remove dead copper, pour order 936): 3369.22,3483.36 3447.94,3483.36 3458.76,3472.54 3458.76,3393.82 3445.97,3381.02 3373.15,3381.02 3365.28,3388.9 3365.28,3474.5 3370.2,3479.42
VCCA on Bottom Layer "Bottom Layer-VCCA 1" (solid, remove dead copper, pour order 935): 1190.64,1433.69 1190.64,1370.71 1259.52,1370.71 1274.28,1355.95 1366.78,1355.95 1366.78,1374.65 1315.61,1374.65 1307.74,1382.52 1307.74,1423.85 1250.66,1423.85 1234.92,1439.59 1199.5,1439.59 1191.62,1431.72
REGOUT.0 on Bottom Layer "Bottom Layer-REGOUT.0" (solid, remove dead copper, pour order 934): 611.06,2499.36 671.09,2499.36 678.96,2491.49 678.96,2441.3 650.42,2412.77 650.42,2372.42 597.29,2372.42 597.29,2484.6 612.05,2499.36
NetX8_4 on Bottom Layer "Bottom Layer-NetX8_4" (solid, remove dead copper, pour order 933): 3136.99,2248.44 3224.57,2248.44 3224.57,2180.54 3216.7,2172.67 3136.01,2172.67 3136.01,2247.46
GND on Bottom Layer "Bottom Layer-GND 5" (solid, remove dead copper, pour order 932): 2205.14,1109.95 2263.2,1109.95 2275.99,1097.16 2275.99,1026.31 2201.21,1026.31 2201.21,1106.02
VCC on Bottom Layer "Bottom Layer-VCC 1" (solid, remove dead copper, pour order 931): 2200.22,1007.62 2200.22,961.37 2206.13,955.46 2287.8,955.46 2295.67,963.34 2295.67,1007.62
NetU31_P6 on Bottom Layer "Bottom Layer-NetU31_P6" (solid, remove dead copper, pour order 930): 1397.28,1783.01 1397.28,1741.68 1408.1,1730.86 1481.9,1730.86 1481.9,1779.07 1476.98,1783.99 1398.26,1783.99
VCC-DDR on Bottom Layer "Bottom Layer-VCC-DDR 1" (solid, remove dead copper, pour order 929): 2272.06,1850.9 2347.82,1850.9 2347.82,1813.51 2337,1802.69 2247.46,1802.69 2247.46,1822.37 2273.04,1847.95
NetU31_H6 on Bottom Layer "Bottom Layer-NetU31_H6" (solid, remove dead copper, pour order 928): 2280.91,1785.96 2341.92,1785.96 2341.92,1734.79 2336.02,1728.89 2278.94,1728.89 2278.94,1783.01

## Keep-outs
Keep-Out Layer:
  circle w7.87: c2626.97,3772.64 r26.45
  circle w7.87: c2310.04,3770.67 r26.45
  lines w10: 272.64,3932.09 3803.15,3932.09 3841.54,3928.15 3872.05,3916.34 3905.51,3897.64 3930.12,3881.89 3947.83,3866.14 3965.55,3843.5 3982.28,3813.98 3991.14,3787.4 3997.05,3755.91 3997.05,3693.9 3997.05,289.37 3991.14,255.91 3974.41,214.57 3954.72,183.07 3929.13,158.46 3893.7,133.86 3873.03,123.03 3847.44,112.2 213.58,112.2 185.04,117.13 148.62,132.87 116.14,156.5 83.66,193.9 65.94,225.39 55.12,258.86 48.23,284.45 48.23,3749.02 53.15,3789.37 68.9,3822.83 86.61,3853.35 110.24,3876.97 143.7,3901.57 171.26,3916.34 205.71,3927.17 231.3,3932.09 273.62,3932.09

## Other copper
MidLayer1:
  rectangle net GND: 1338.24,3813 2792.02,3904.51
MidLayer2:
  rectangle net VCC: 3000.22,2546.59 3082.02,2621.38
  rectangle net VCC: 2065.42,1580.3 2079.19,1608.84
  rectangle net VCC: 2113.63,1611.79 2144.14,1633.78

## Silkscreen, mask and mechanical layers (free items; w line width, h text height)
Top Overlay:
  drawing of 153 lines, arcs and shapes, not listed
  text "PWM" at 3200.79,3631.89 h23.62
  text "VCC" at 2987.2,3630.91 h23.62
  text "SPEED" at 3070.87,3629.92 h23.62
  text "GND" at 2898.62,3628.94 h23.62
  text "PWM" at 3737.2,3625.98 h23.62
  text "VCC" at 3520.67,3622.05 h23.62
  text "SPEED" at 3609.25,3622.05 h23.62
  text "GND" at 3441.93,3621.06 h23.62
  text "GND" at 1636.81,3410.43 h23.62
  text "VCC" at 1331.69,3408.46 h23.62
  text "RXD" at 1437.01,3408.46 h23.62
  text "TXD" at 1540.35,3408.46 h23.62
  text "E" at 1736.22,2158.46 h98.43
  text "2" at 2234.25,2158.46 h98.43
  text "0" at 2331.69,2158.46 h98.43
  text "Z" at 2037.4,2157.48 h98.43
  text "5" at 2436.02,2157.48 h98.43
  text "B" at 1826.77,2156.5 h98.43
  text "A" at 1926.18,2155.51 h98.43
  text "4" at 2133.86,2152.56 h98.43
  text "GND" at 3814.96,794.29 h31.5
  text "DXSY" at 173.23,637.8 h31.5
  text "12V" at 3815.95,625.98 h31.5
  text "IN" at 3071.85,539.37 h31.5
  text "GND" at 2872.05,537.4 h31.5
  text "12V" at 2978.35,536.42 h31.5
  text "GND" at 1947.83,530.51 h31.5
  text "12V" at 2049.21,530.51 h31.5
  text "IN" at 2141.73,531.5 h31.5
  text "GND" at 1014.76,519.68 h31.5
  text "12V" at 1132.87,518.7 h31.5
  text "IN" at 1226.38,518.7 h31.5
Bottom Overlay:
  circle w10: c3298.1,311.02 r88.46
  circle w10: c250.97,3453.74 r143.69
  circle w10: c255.9,1090.55 r143.69
  circle w10: c3802.16,3460.63 r143.69
  circle w10: c3804.12,1101.38 r143.69
  lines w7.87: 1013.78,2011.81 1086.61,2011.81 1086.61,1866.14 822.83,1866.14 822.83,2011.81 1015.75,2011.81 ; 1015.75,1866.14 1015.75,1639.76 1426.18,1639.76 1426.18,1490.16 1261.81,1490.16 ; 1405.51,2239.17 1405.51,1651.57 1665.35,1651.57 1665.35,1557.09 ; 1442.91,1474.41 1486.22,1474.41 1486.22,1308.07 1000.98,1308.07 1000.98,1474.41 1445.87,1474.41 ; 1508.86,1281.5 1491.14,1281.5 1491.14,1476.38 1611.22,1476.38 1611.22,1349.41 1611.22,1281.5 1598.43,1281.5 ; 1517.72,2460.63 1555.12,2460.63 1555.12,2239.17 1085.63,2239.17 1085.63,2460.63 1521.65,2460.63 ; 1564.96,2974.41 1019.69,2974.41 1019.69,2720.47 1555.12,2720.47 1555.12,2871.06 2044.29,2871.06 2044.29,2864.17 ; 1728.35,1457.68 1941.93,1457.68 1941.93,1246.06 1631.89,1246.06 1631.89,1457.68 1733.27,1457.68 ; 2053.15,2958.66 2053.15,3101.38 2141.73,3101.38 ; 2132.87,2944.88 2186.02,2944.88 2186.02,3101.38 2139.76,3101.38 ; 2687.01,1065.94 2719.49,1065.94 2719.49,895.67 2455.71,895.67 2455.71,1065.94 2689.96,1065.94 ; 2880.91,3758.86 3220.47,3758.86 3220.47,3894.68 3186.02,3894.68 ; 2881.89,3637.8 3245.08,3637.8 3245.08,3512.8 2976.38,3512.8 2976.38,3468.5 2880.91,3468.5 2880.91,3894.68 3187.01,3894.68 ; 3239.17,258.86 3348.43,366.14 ; 3270.67,3621.06 3270.67,3904.53 3678.15,3904.53 3678.15,3649.61 ; 3345.47,3524.61 3678.15,3524.61 3678.15,3651.57 ; 3531.5,229.33 3531.5,247.05 ; 3541.34,221.46 3560.04,221.46 ; 3542.32,257.87 3561.02,257.87 ; 3544.29,297.24 3562.01,297.24 ; 3569.88,229.33 3569.88,247.05 ; 3569.88,267.72 3569.88,286.42 ; 3597.44,231.3 3597.44,250 ; 3597.44,270.67 3597.44,288.39 ; 3607.28,257.87 3625,257.87 ; 3634.84,269.68 3634.84,287.4 ; 3664.37,230.31 3664.37,248.03 ; 3664.37,268.7 3664.37,287.4 ; 3674.21,298.23 3692.91,298.23 ; 3730.32,231.3 3730.32,249.02 ; 3730.32,269.68 3730.32,288.39
  lines w10: 3106.3,2984.25 3156.5,2984.25 3156.5,1214.57 2759.84,1214.57 2759.84,2984.25 3111.22,2984.25
  text "CODE" at 3074.8,2293.31 h35.43 r90
  text "LABEL" at 3074.8,2105.31 h39.37 r90
  text "MY" at 3623.03,338.58 h43.31
  text "p" at 3349.41,296.26 h90.55
  text "b" at 3281.5,267.72 h90.55

## Text inside footprints (layer, text, board x,y; h text height)
DATA1: Top Overlay "20" at 2187.99,364.17 h31.5; Top Overlay "19" at 2192.91,450.79 h31.5; Top Overlay "2" at 3085.63,368.11 h31.5; Top Overlay "1" at 3093.5,452.76 h31.5
DATA2: Top Overlay "20" at 1263.78,381.89 h31.5; Top Overlay "19" at 1266.73,458.66 h31.5; Top Overlay "2" at 2156.5,367.13 h31.5; Top Overlay "1" at 2159.45,452.76 h31.5
DATA3: Top Overlay "20" at 328.74,376.97 h31.5; Top Overlay "19" at 333.66,441.93 h31.5; Top Overlay "2" at 1224.41,381.89 h31.5; Top Overlay "1" at 1227.36,449.8 h31.5
EC2: Top Overlay "+" at 3695.87,1380.91 h39.37
EC6: Top Overlay "+" at 3704.72,1792.32 h39.37
J4: Top Overlay "4" at 3216.54,803.15 h47.24; Top Overlay "3" at 3212.6,612.2 h47.24
LED6: Top Overlay "+" at 1263.78,3453.74 h47.24; Top Overlay "-" at 1160.43,3454.72 h47.24
U20: Bottom Overlay "B" at 378.94,1546.26 h31.5
U21: Bottom Overlay "B" at 212.6,1664.37 h31.5 r270
U24: Top Overlay "48" at 487.2,2228.35 h23.62; Top Overlay "37" at 446.85,2498.03 h23.62; Top Overlay "36" at 575.79,2610.24 h23.62 r180; Top Overlay "25" at 805.12,2560.04 h23.62; Top Overlay "24" at 848.43,2504.92 h23.62; Top Overlay "13" at 850.39,2229.33 h23.62; Top Overlay "12" at 786.42,2155.51 h23.62; Top Overlay "1" at 561.02,2170.28 h23.62 r180
U30: Bottom Overlay "B" at 1569.88,622.05 h31.5
U31: Top Overlay "Y" at 1534.45,1862.28 h23.62 r270; Top Overlay "R" at 1693.9,1860.32 h23.62 r270; Top Overlay "P" at 1723.43,1859.33 h23.62 r270; Top Overlay "N" at 1752.95,1860.32 h23.62 r270; Top Overlay "M" at 1785.43,1859.33 h23.62 r270; Top Overlay "K" at 1851.38,1859.33 h23.62 r270; Top Overlay "H" at 1912.4,1861.3 h23.62 r270; Top Overlay "D" at 2032.48,1859.33 h23.62 r270; Top Overlay "T" at 1665.36,1861.3 h23.62 r270; Top Overlay "W" at 1565.95,1864.25 h23.62 r270; Top Overlay "V" at 1593.51,1862.28 h23.62 r270; Top Overlay "U" at 1625.99,1862.28 h23.62 r270; Top Overlay "J" at 1881.89,1859.33 h23.62 r270; Top Overlay "G" at 1942.92,1861.3 h23.62 r270; Top Overlay "F" at 1971.46,1857.36 h23.62 r270; Top Overlay "E" at 2001.97,1859.33 h23.62 r270; Top Overlay "C" at 2070.87,1862.28 h23.62 r270; Top Overlay "B" at 2100.4,1859.33 h23.62 r270; Top Overlay "A" at 2129.92,1862.28 h23.62 r270; Top Overlay "L" at 1814.96,1857.36 h23.62 r270; Top Overlay "1" at 2182.84,1814.96 h23.62 r270; Top Overlay "2" at 2184.8,1775.59 h23.62 r270; Top Overlay "3" at 2182.84,1747.05 h23.62 r270; Top Overlay "4" at 2184.8,1717.52 h23.62 r270; Top Overlay "5" at 2184.8,1689.96 h23.62 r270; Top Overlay "6" at 2182.84,1658.47 h23.62 r270; Top Overlay "7" at 2182.84,1626.97 h23.62 r270; Top Overlay "8" at 2183.82,1601.38 h23.62 r270; Top Overlay "9" at 2183.82,1568.9 h23.62 r270; Top Overlay "10" at 2183.82,1544.29 h23.62 r270; Top Overlay "11" at 2182.84,1500 h23.62 r270; Top Overlay "12" at 2182.84,1471.46 h23.62 r270; Top Overlay "15" at 2183.82,1375.99 h23.62 r270; Top Overlay "16" at 2183.82,1343.5 h23.62 r270; Top Overlay "17" at 2185.79,1315.95 h23.62 r270; Top Overlay "18" at 2185.79,1283.47 h23.62 r270; Top Overlay "19" at 2182.84,1248.03 h23.62 r270; Top Overlay "20" at 2182.84,1207.68 h23.62 r270
U66: Top Overlay "C" at 2185.2,2785.17 h31.5 r270; Top Overlay "A" at 2249.17,2785.18 h31.5 r270; Top Overlay "E" at 2121.22,2783.21 h31.5 r270; Top Overlay "G" at 2058.23,2785.17 h31.5 r270; Top Overlay "J" at 1996.22,2782.22 h31.5 r270; Top Overlay "L" at 1930.28,2781.24 h31.5 r270; Top Overlay "N" at 1867.28,2784.19 h31.5 r270; Top Overlay "R" at 1803.31,2784.19 h31.5 r270; Top Overlay "B" at 2220.71,2372.54 h31.5 r270; Top Overlay "D" at 2156.73,2376.47 h31.5 r270; Top Overlay "F" at 2092.76,2374.51 h31.5 r270; Top Overlay "T" at 1777.8,2377.46 h31.5 r270; Top Overlay "M" at 1903.78,2378.44 h31.5 r270; Top Overlay "P" at 1840.79,2375.49 h31.5 r270; Top Overlay "H" at 2032.72,2377.46 h31.5 r270; Top Overlay "9" at 2304.57,2471.36 h31.5 r270; Top Overlay "7" at 2305.55,2534.35 h31.5 r270; Top Overlay "3" at 2303.58,2666.24 h31.5 r270; Top Overlay "1" at 2303.58,2719.39 h31.5 r270